# EAGLE board sensor brd (EAGLE 7.5.0)
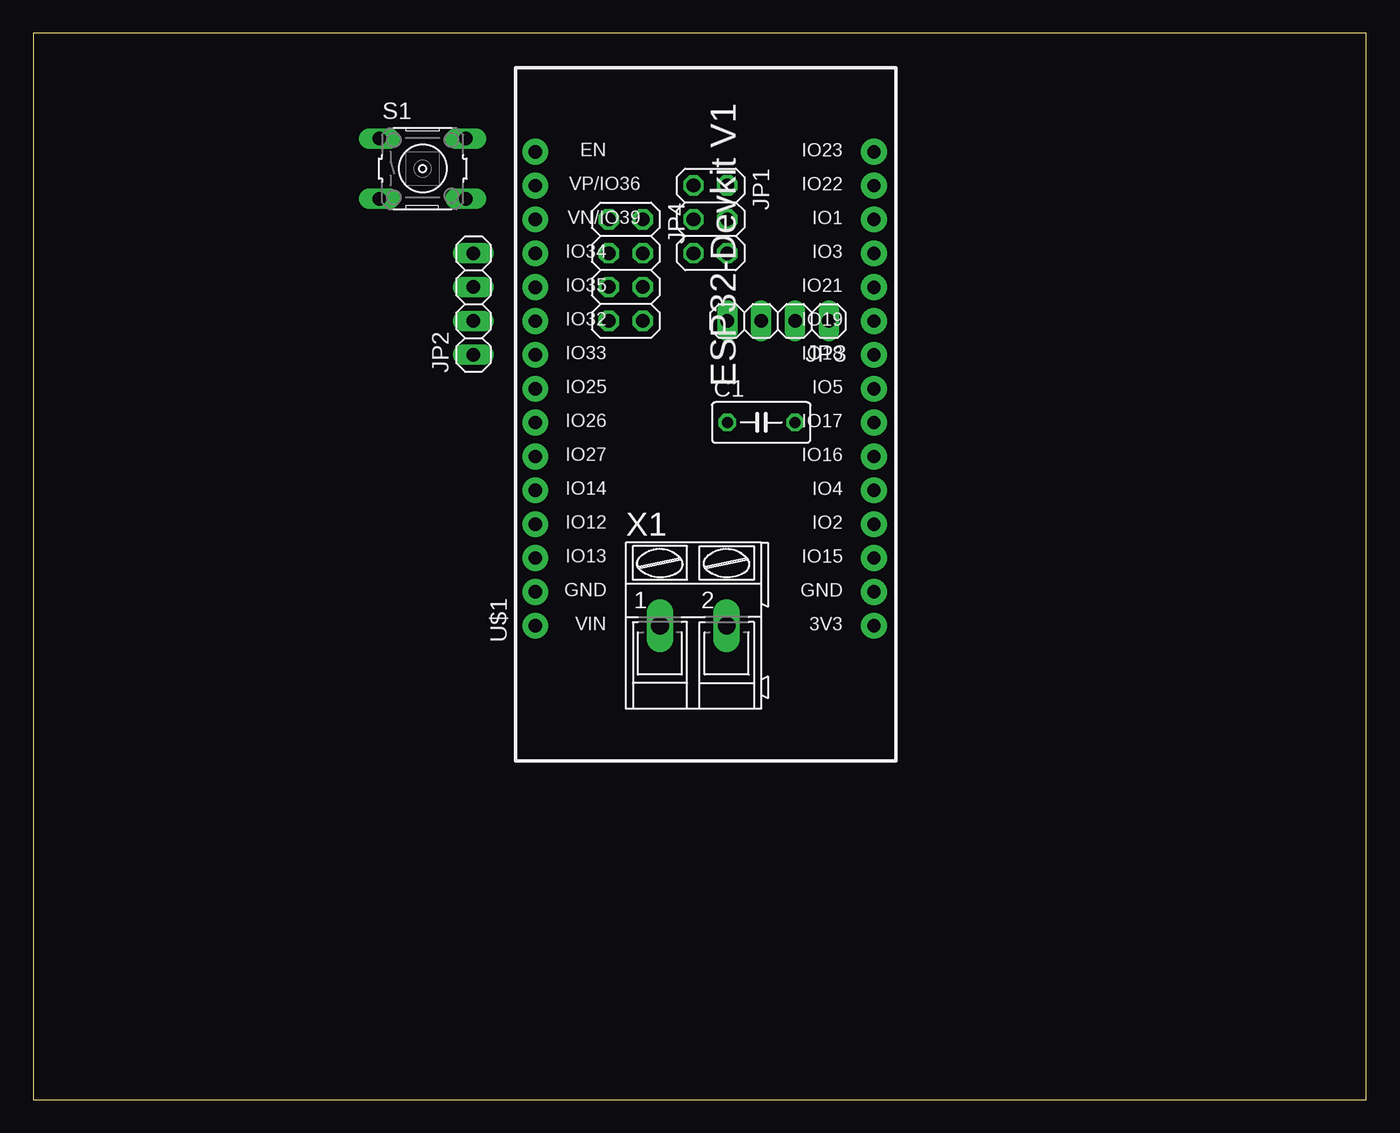
[diagram p0: board, top side]
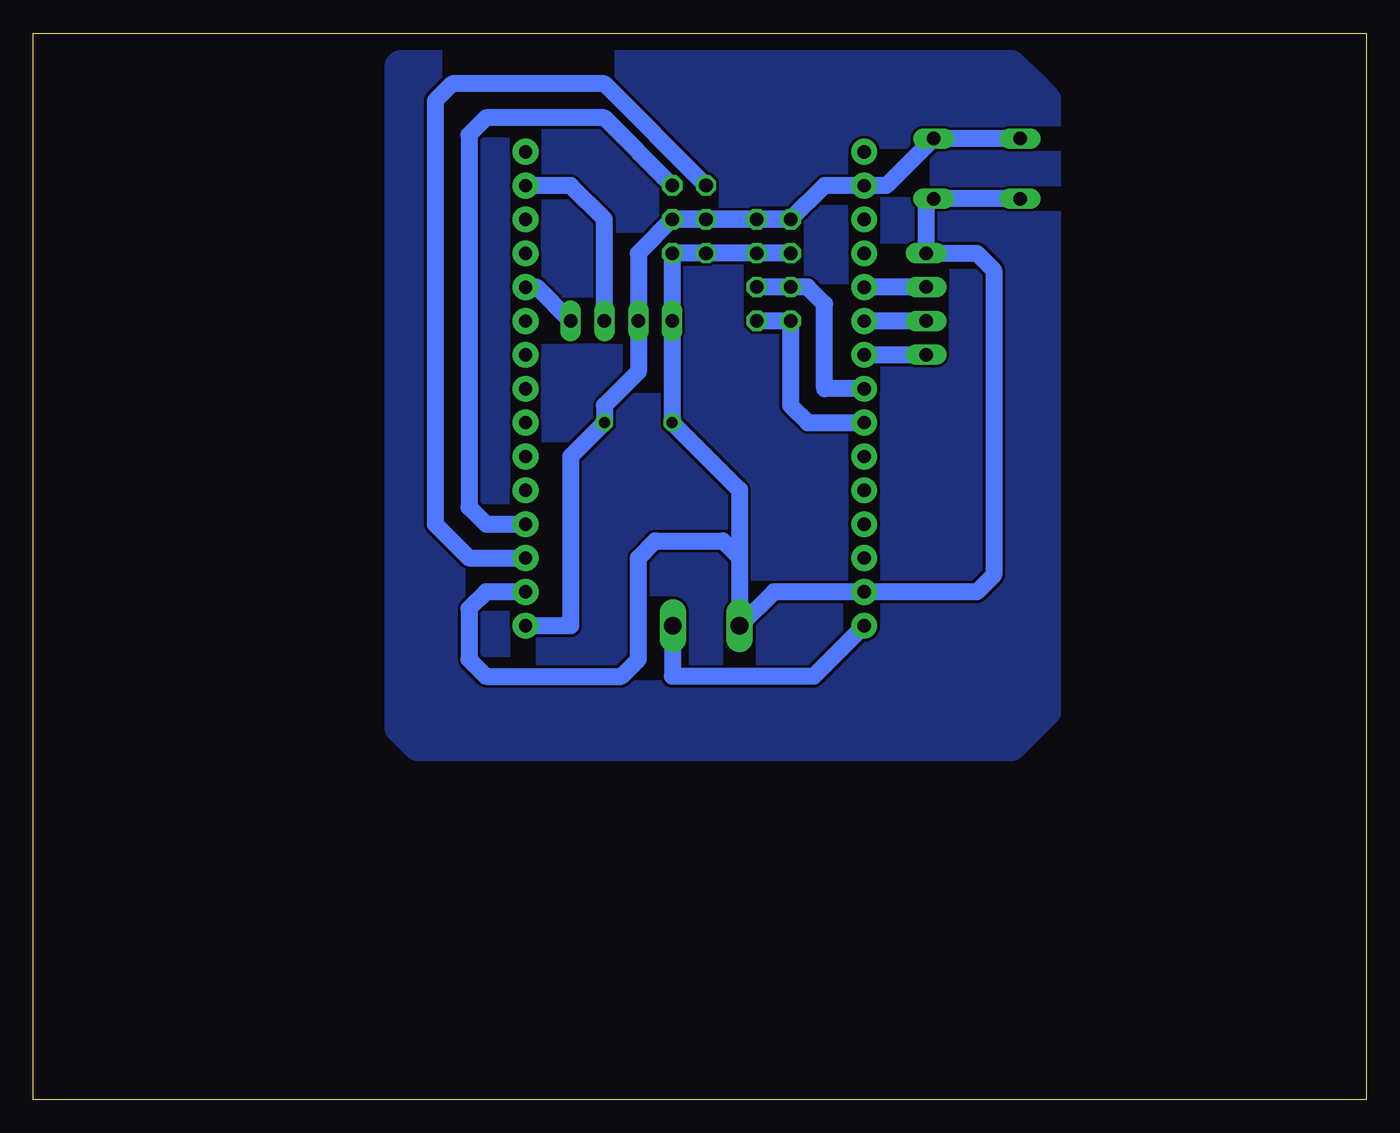
[diagram p1: board, bottom side, seen from below]

Size 100 x 80 mm. Coordinates in mm from the lower left corner, seen from the top.
Outline: 0,0 100,0 100,80 0,80 0,0
Copper layers (1*16): Top 0.035mm / dielectric 1.5mm / Bottom 0.035mm
Design rules "default": minimum track width 10mil, minimum drill 24mil, track to track 8mil, track to pad 8mil, pad to pad 8mil, via to via 8mil, smd to smd 8mil, copper to edge 40mil, drill to drill 8mil, minimum pad ring 10mil, minimum via ring 8mil, stop-mask expansion 4mil, vias tented up to drill 0mil, thermal gap 10mil

## Footprints (pad centres in the part's own frame; a part is rotated, then mirrored left to right if it is on the bottom)
C050-030X075 = drill 0.813 octagon: 1 -2.54,0; 2 2.54,0
2X03 = drill 1.016 octagon: 1 -2.54,-1.27; 2 -2.54,1.27; 3 0,-1.27; 4 0,1.27; 5 2.54,-1.27; 6 2.54,1.27
1X04 = drill 1.016 long: 1 -3.81,0; 2 -1.27,0; 3 1.27,0; 4 3.81,0
2X04 = drill 1.016 octagon: 1 -3.81,-1.27; 2 -3.81,1.27; 3 -1.27,-1.27; 4 -1.27,1.27; 5 1.27,-1.27; 6 1.27,1.27; 7 3.81,-1.27; 8 3.81,1.27
B3F-10XX = drill 1.016 long: 1 -3.251,2.261; 2 3.251,2.261; 3 -3.251,-2.261; 4 3.251,-2.261
ESP32-DEVKITV1 = drill 1 pad 1.93: 3V3 -16.52,-12.27; D1 13.96,-12.27; D2 -8.9,-12.27; D3 11.42,-12.27; D4 -6.36,-12.27; D5 1.26,-12.27; D12 -8.9,13.135; D13 -11.44,13.135; D14 -6.36,13.135; D15 -11.44,-12.27; D16 -3.82,-12.27; D17 -1.28,-12.27; D18 3.8,-12.27; D19 6.34,-12.27; D21 8.88,-12.27; D22 16.5,-12.27; D23 19.04,-12.27; D25 1.26,13.135; D26 -1.28,13.135; D27 -3.82,13.135; D32 6.34,13.135; D33 3.8,13.135; D34 11.42,13.135; D35 8.88,13.135; D36 16.5,13.135; D39 13.96,13.135; EN 19.04,13.135; GND@1 -13.98,13.135; GND@2 -13.98,-12.27; VIN -16.52,13.135
AK300/2 = drill 1.321 long: 1 -2.515,0; 2 2.489,0

## Placement (x,y rotation side)
C1  [C050-030X075]  54.61,50.8 0 top
JP1  [2X03]  50.8,66.04 270 top
JP2  [1X04]  33.02,59.69 90 top
JP3  [1X04]  55.88,58.42 180 top
JP4  [2X04]  44.45,62.23 270 top
S1  [B3F-10XX]  29.21,69.85 0 top
U$1  ESP32DEVKITV1  [ESP32-DEVKITV1]  50.8,52.07 90 top
X1  [AK300/2]  49.53,35.56 0 top

## Library data of the parts
C1 = rcl; SPICEPREFIX: C
JP1-JP4 = pinhead
S1 = switch-omron; MPN: B3F-1000; OC_FARNELL: 176432; OC_NEWARK: 36M3542
U$1 = esp32-devkitv1
X1 = con-ptr500; OC_FARNELL: unknown; OC_NEWARK: unknown

## Nets
GND: C1.1 JP1.5 JP1.6 JP2.4 JP3.4 JP4.3 JP4.4 S1.3 S1.4 U$1.GND@1 U$1.GND@2 X1.1
MOISTURE: JP1.2 U$1.D2
OUT1: JP2.1 U$1.D33
OUT2: JP2.2 U$1.D32
OUT3: JP2.3 U$1.D35
PH: JP1.1 U$1.D15
SCL: JP3.2 U$1.D22
SCL2: JP4.5 JP4.6 U$1.D25
SDA: JP3.1 U$1.D21
SDA2: JP4.7 JP4.8 U$1.D26
V: C1.2 JP1.3 JP1.4 JP3.3 JP4.1 JP4.2 S1.1 S1.2 U$1.3V3 U$1.D36
VIN: U$1.VIN X1.2

## Tracks (layer width: path | path; a pad name or v marks a point on that pad's centre or on a via)
GND
  Bottom 1.27: S1.3 S1.4 33.02,67.03 JP2.4 29.21,63.5 27.94,62.23 27.94,39.37 29.22,38.09 U$1.GND@1 37.67,38.1 44.45,38.1 46.99,35.56 X1.1 47.02,40.66 | JP4.3 JP4.4 JP1.5 JP1.6 JP3.4 C1.1 47.02,45.74 47.02,40.66 | U$1.GND@2 66.04,38.1 67.31,36.83 67.31,33.02 66.04,31.75 55.88,31.75 54.61,33.02 54.61,40.64 53.34,41.91 48.26,41.91 47.02,40.66
MOISTURE
  Bottom 1.27: JP1.2 57.15,73.66 66.04,73.66 67.31,72.39 67.31,44.45 66.03,43.17 U$1.D2
N$1
  pour Bottom: 25.4,76.2 26.67,77.47 72.39,77.47 72.39,27.94 71.12,26.67 26.67,26.67 24.13,29.21 24.13,74.93
OUT1
  Bottom 1.27: JP2.1 U$1.D33
OUT2
  Bottom 1.27: JP2.2 U$1.D32
OUT3
  Bottom 1.27: JP2.3 U$1.D35
PH
  Bottom 1.27: JP1.1 57.15,76.2 68.58,76.2 69.85,74.93 69.85,43.18 67.31,40.64 63.5,40.64 63.49,40.63 U$1.D15
SCL
  Bottom 1.27: JP3.2 57.15,66.04 59.68,68.57 U$1.D22
SCL2
  Bottom 1.27: U$1.D25 37.67,53.34 40.64,53.34 40.64,59.69 41.91,60.96 JP4.5 JP4.6
SDA
  Bottom 1.27: JP3.1 62.22,60.95 U$1.D21
SDA2
  Bottom 1.27: U$1.D26 41.9,50.79 43.18,52.07 JP4.7 JP4.8
V
  Bottom 1.27: S1.1 S1.2 36,68.57 U$1.D36 37.67,68.58 40.64,68.58 JP4.1 | JP4.1 JP4.2 JP1.3 JP1.4 | JP1.4 JP4.1 | JP1.4 54.61,63.5 JP3.3 54.61,54.61 57.15,52.07 C1.2 59.69,48.26 59.69,35.56 59.7,35.55 U$1.3V3
VIN
  Bottom 1.27: U$1.VIN 41.47,31.75 52.07,31.75 52.02,31.8 X1.2